# Altium PCB DRV8833_Dev.PcbDoc
Units mm, origin at the board's own origin, x right, y up, seen from the top; angles counter-clockwise.
Board outline 28.45 x 22.1 mm, 2 copper layers (Top Layer, Bottom Layer); 10 components, 18 nets, 47 pads, 0 vias.
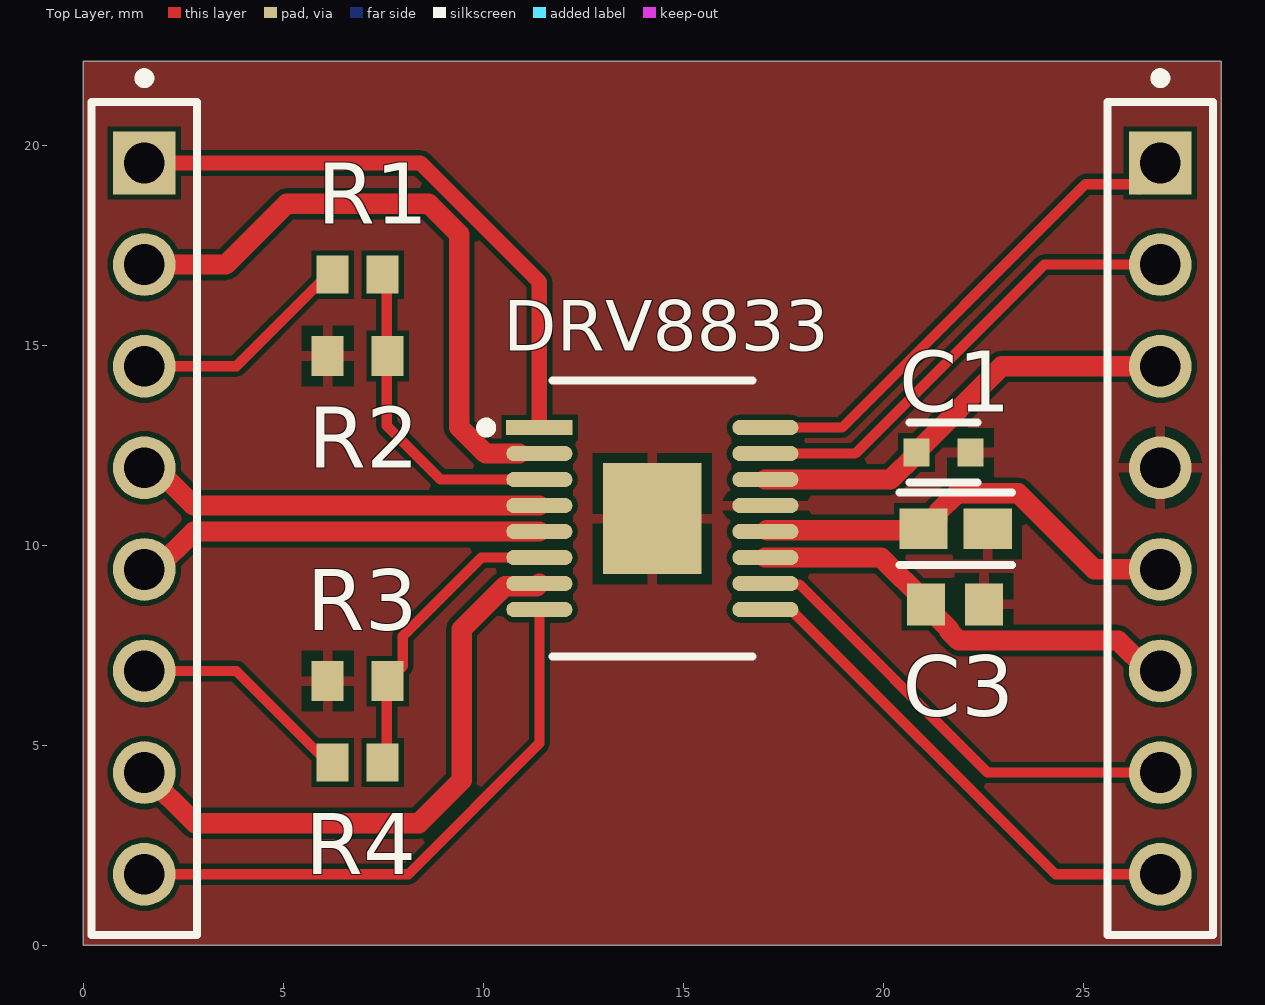
[diagram p0: Top Layer view]
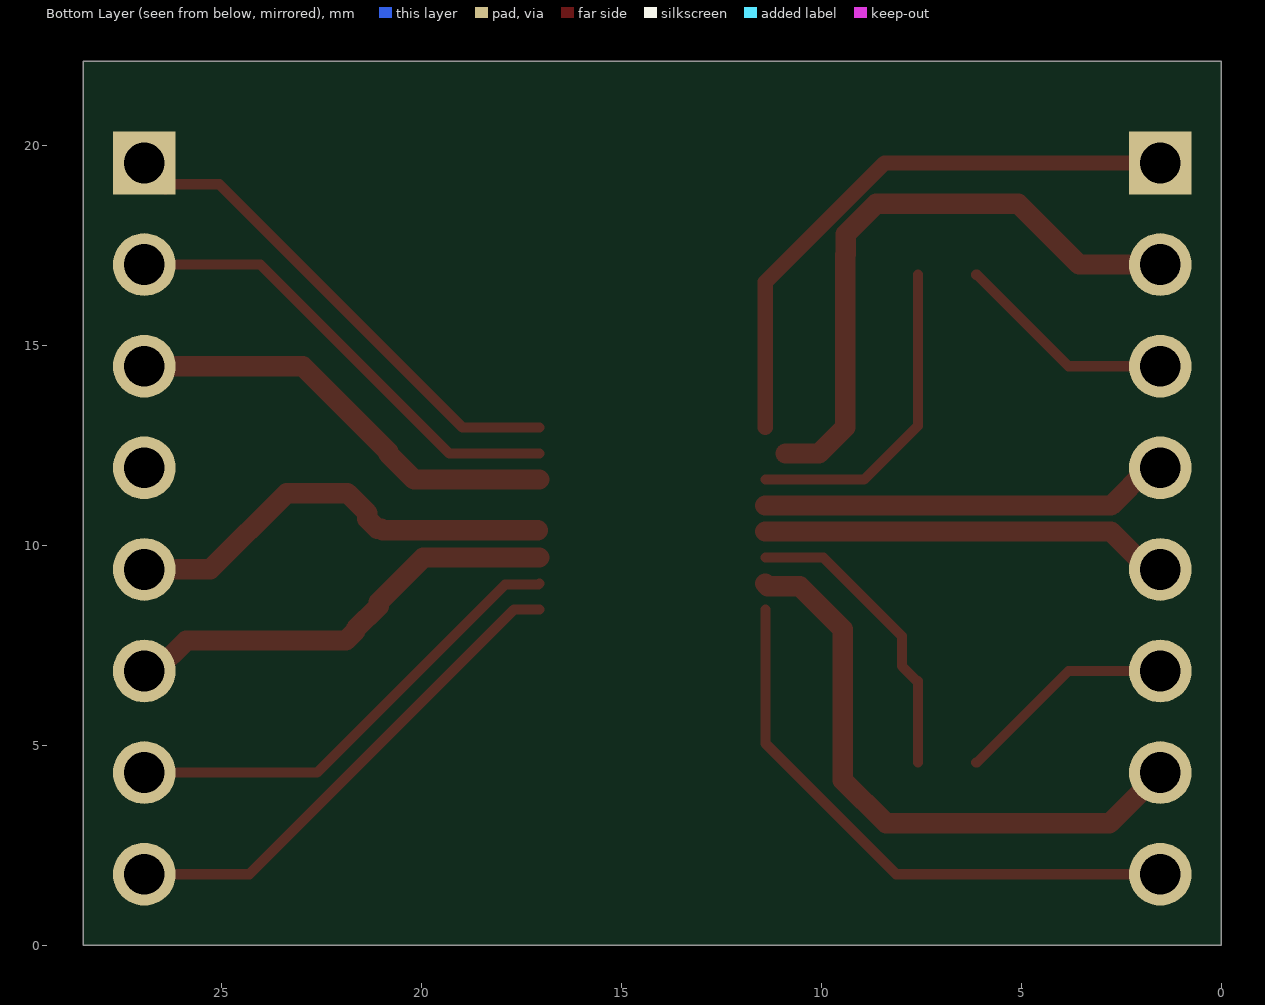
[diagram p1: Bottom Layer view, seen from below]
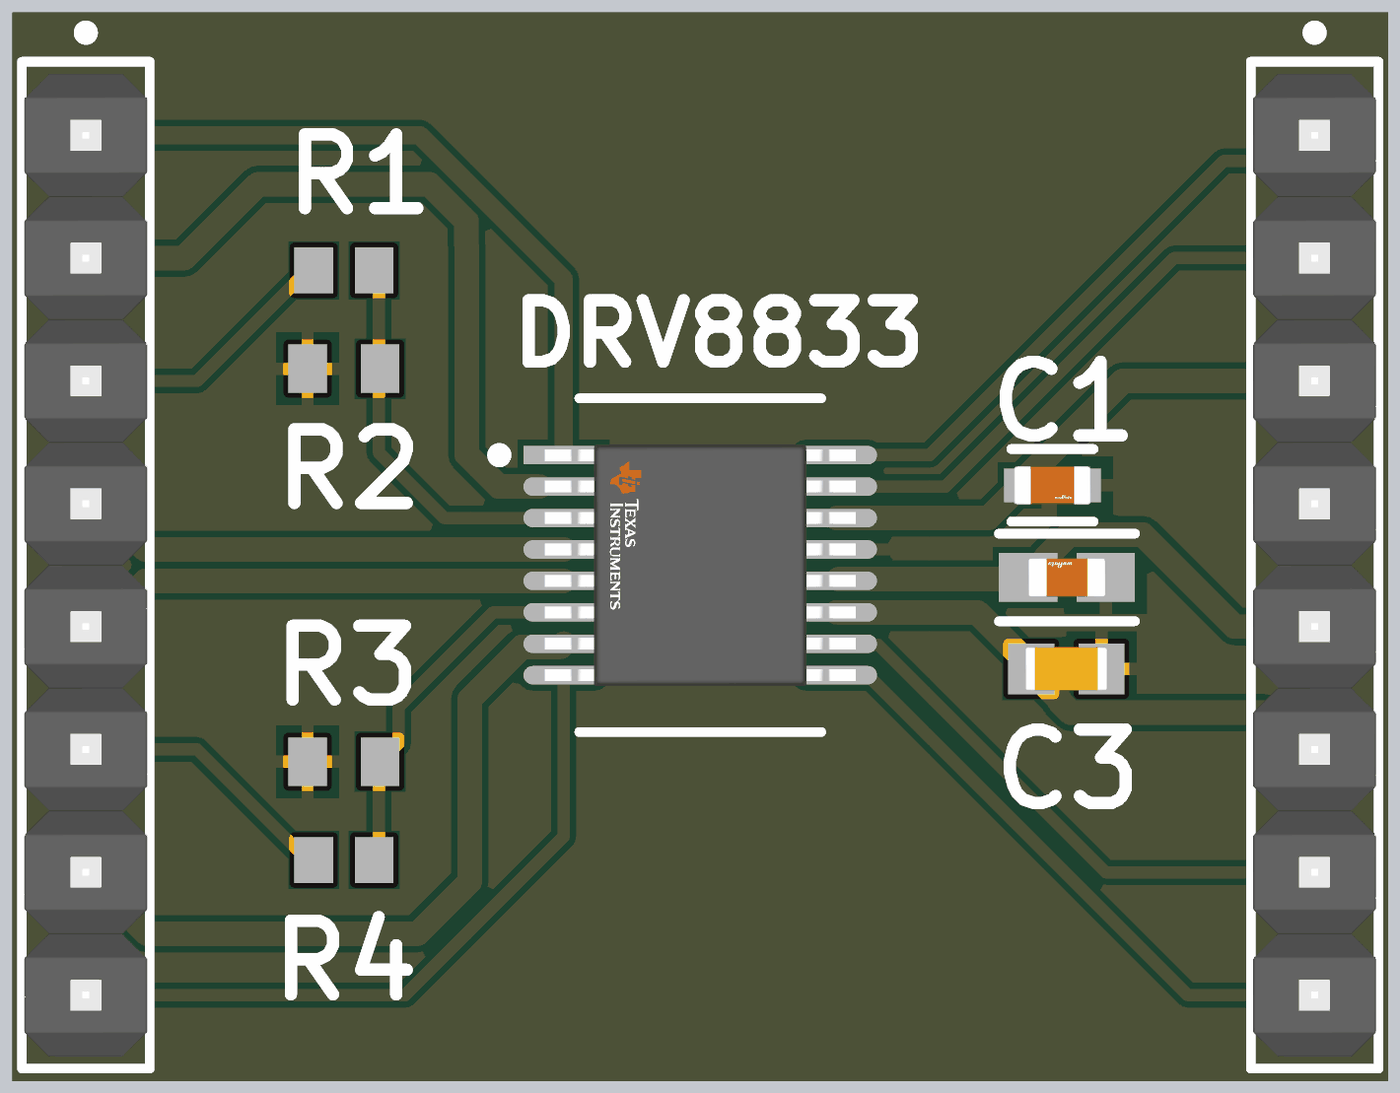
[diagram p2: 3D render of the assembled board from above, using the file's embedded part models]

## Layer stack, top to bottom
Top Solder: solder mask 0.0102, Solder Resist, Dk 3.5
Top Layer: signal copper 0.0356
Dielectric 1: dielectric 0.32, FR-4, Dk 4.8
Bottom Layer: signal copper 0.0356
Bottom Solder: solder mask 0.0102, Solder Resist, Dk 3.5

## Board outline
0,0 0,22.098 28.448,22.098 28.448,0

## Design rules (kind name [scope] priority, off if disabled: settings)
Clearance [All] p1: gap=0.127 ignorepadtopadclearanceinfootprint=FALSE
PolygonConnect [All] p1: connectstyle=Relief reliefconductorwidth=0.254 reliefentries=4 polygonreliefangle="90 Angle" airgapwidth=0.254
RoutingVias [All] p1: holewidth=0.711 width=1.27 viastyle="Through Hole" minholewidth=0.711 minwidth=1.27 maxholewidth=0.711 maxwidth=1.27
SilkToSolderMaskClearance [IsPad] p1 off: minsilkscreentomaskgap=0.254 clearancetoexposedcopper=TRUE
SolderMaskExpansion [All] p1: expansion=0.102 istentingtop=FALSE
Width [All] p1: maxlimit=0.508 minlimit=0.254 preferedwidth=0.254 minimp=50.000000 maximp=50.000000 favimp=50.000000
29 further rules are at their usual default settings.

## Classes and differential pairs
component class DRV8833_Dev: C1 C3 DRV8833 R1 R2 R3 R4

## Components (designator, comment, footprint, x,y, rotation, side; value= is the part's Value field where it differs from the comment)
C1 "2.2 uF" FP-GRM188-0_1-e0_2_0_5-MFG 21.503,12.319 r0 top
C2 "10uF" FP-GRM188-0_1-e0_2_0_55-IPC_A 21.804,10.414 r180 top
C3 "0.01 uF" CAPC1608X90X35ML10T15 21.791,8.526 r180 top
Conn1 "M20-9990846" FP-M20-9990846-MFG 1.524,10.668 r270 top
Conn2 "M20-9990846" FP-M20-9990846-MFG 26.924,10.668 r270 top
DRV8833 "DRV8833PWPR" FP-PWP0016C-IPC_B 14.224,10.668 r0 top (schematic designator U?)
R1 "" RESC1609X50X30NL10T20 6.858,16.764 r180 top
R2 "" RESC1608X55X25ML10T15 6.858,14.732 r180 top
R3 "" RESC1608X55X25ML10T15 6.858,6.604 r180 top
R4 "" RESC1609X50X30NL10T20 6.858,4.572 r180 top

## Footprints (in the part's own frame and the unit in brackets; to place one, negate y for a bottom-side part, rotate by r counter-clockwise, add the part's x,y. Pads: shape width x height; smd on the part's side, far side on the other; paste and mask are expansions set on the pad)
CAPC1608X90X35ML10T15 [mm] "Chip Capacitor, 2-Leads, Body 1.7x0.9mm, IPC Low Density"
  rect 0.95x1.05 smd: 1(-0.725,0) 2(0.725,0)
  body extent -0.85,-0.45 0.85,0.45, height 0.9
FP-GRM188-0_1-e0_2_0_5-MFG [mm]
  rect 0.65x0.7 smd paste+0 mask+0: 1(-0.675,0) 2(0.675,0)
  silkscreen extent -0.85,-0.75 0.85,0.75, body extent -1.1,-0.55 1.1,0.55, height 0.25
FP-GRM188-0_1-e0_2_0_55-IPC_A [mm]
  rect 1.208x1.012 smd paste+0 mask+0: 1(-0.802,0) 2(0.802,0)
  silkscreen extent -1.41,-0.91 1.41,0.91, body extent -1.91,-1.01 1.91,1.01, height 0.25
FP-M20-9990846-MFG [mm]
  rect 1.57x1.57 hole 1.02 paste-1000 mask+0: 1(-8.89,0)
  round 1.57 hole 1.02 paste-1000 mask+0: 2(-6.35,0) 3(-3.81,0) 4(-1.27,0) 5(1.27,0) 6(3.81,0) 7(6.35,0) 8(8.89,0)
  silkscreen extent -11.13,-1.32 10.41,1.32, body extent -10.51,-1.42 10.51,1.42, height 0.25
FP-PWP0016C-IPC_B [mm]
  rect 1.655x0.381 smd paste+0 mask+0: 1(-2.825,2.275)
  rrect100% 1.655x0.381 smd paste+0 mask+0: 2(-2.825,1.625) 3(-2.825,0.975) 4(-2.825,0.325) 5(-2.825,-0.325) 6(-2.825,-0.975) 7(-2.825,-1.625) 8(-2.825,-2.275) 9(2.825,-2.275) 10(2.825,-1.625) 11(2.825,-0.975) 12(2.825,-0.325) 13(2.825,0.325) 14(2.825,0.975) 15(2.825,1.625) 16(2.825,2.275)
  rect 2.46x2.77 smd paste-1000 mask+0: 17(0,0)
  silkscreen extent -4.28,-3.45 2.5,3.45, body extent -3.9,-2.75 3.9,2.75, height 0.25
RESC1608X55X25ML10T15 [mm] "Chip Resistor, 2-Leads, Body 1.60x0.80mm, IPC Low Density"
  rect 0.8x1 smd: 1(-0.75,0) 2(0.75,0)
  body extent -0.85,-0.45 0.85,0.45, height 0.55
RESC1609X50X30NL10T20 [mm] "Chip Resistor, 2-Leads, Body 1.55x0.85mm, IPC Medium Density"
  rect 0.8x0.95 smd: 1(-0.625,0) 2(0.625,0)
  body extent -0.82,-0.48 0.82,0.48, height 0.5

## Part data
C1: library part CMP-2006-02836-2, "Chip Multilayer Ceramic Capacitors for General Purpose, 0603, 2.2uF, X7R, 15%, 10%, 10V", Capacitance=2.2uF, Case Code (Imperial)=0603, Case Code (Metric)=1608, Dielectric=X7R, Max Operating Temperature=125°C, Min Operating Temperature=-55°C, Package Quantity=1, Tolerance=10%, Voltage=10V, Case/Package=0603, Depth=0.8mm, Height=0.8mm, Lead Free="Lead Free", Length=1.6mm, Material=Ceramic, Mount="Surface Mount", Number of Pins=2, Packaging="Cut Tape", REACH SVHC="No SVHC", Termination=SMD/SMT, Thickness=0.035inch, Voltage Rating=10V, Voltage Rating (DC)=10V, Weight=7.1E-05oz, Width=0.031inch
C2: library part CMP-2006-02792-2, "Chip Multilayer Ceramic Capacitors for General Purpose, 0603, 10uF, X5R, 15%, 20%, 6.3V", Case Code (Imperial)=0603, Case Code (Metric)=1608, Dielectric=X5R, Max Operating Temperature=85°C, Min Operating Temperature=-55°C, Package Quantity=4000, Tolerance=20%, Voltage=6.3V, Capacitance=10uF, Case/Package=0603, Depth=0.8mm, Height=0.8mm, Lead Free="Lead Free", Length=1.6mm, Material=Ceramic, Mount="Surface Mount", Packaging="Tape and Reel", Radiation Hardening=No, REACH SVHC="No SVHC", Termination=SMD/SMT, Thickness=0.035inch, Voltage Rating=6.3V, Voltage Rating (DC)=6.3V, Width=0.031inch
C3: library part CMP-2100-03642-1, "Chip Capacitor, 10 nF, +/- 10%, 50 V, -55 to 125 degC, 0603 (1608 Metric), RoHS, Tape and Reel", Capacitance=10nF, Case Code (Imperial)=0603, Case Code (Metric)=1608, Dielectric=X7R, Dielectric Material=Ceramic, Insulation Resistance=10GR, Manufacturer=Murata, Max Operating Temperature=125degC, Min Operating Temperature=-55degC, Package Description="2-Pin Surface Mount Device, Body 1.6 x 0.8 mm", Package Quantity=1, Tolerance=10%, Voltage=50V, Case/Package=0603, Datasheet URL=http://search.murata.co.jp/Ceramy/image/img/A01X/G101/ENG/GRM188R71H103KA01-01.pdf, Datasheet Version=42401.0, Depth=0.8mm, Height=0.8mm, Lead Free=LeadFree, Length=1.6mm, Manufacturer URL=http://www.murata.com/, Material=Ceramic, Mount=SurfaceMount, Number of Pins=2, Package Reference=0603, Packaging=TapeandReel, REACH SVHC=Unknown, RoHSCompliant=True, Termination=SMD/SMT, Thickness=0.035inch, Voltage Rating=50V, Voltage Rating (DC)=50V, Width=0.031inch
Conn1 Conn2: library part CMP-15831-000033-1, "CONN HEADER VERT 8POS 2.54MM", Case/Package=SIL, Color=Black, Contact Resistance=30mR, Current Rating=3A, Insulation Resistance=1GR, Max Operating Temperature=105°C, Min Operating Temperature=-40°C, Package Quantity=1000, Connector Type="Male Pin", Contact Material=Brass, Contact Mating Length=0.24inch, Contact Plating=Tin, Contact Type="Male Pin", Depth=2.54mm, Gender=Male, Housing Color=Black, Housing Material=Nylon, Length=20.32mm, Max Current Rating=3A, Mount="Through Hole", Number of Contacts=8, Number of Positions=8, Number of Rows=1, Orientation=Straight, Packaging=Bulk, Pitch=2.54mm, Radiation Hardening=No, REACH SVHC="No SVHC", RoHS Compliant=Yes, Series=M20, Termination=Solder
DRV8833: library part CMP-1529-00004-3, "IC MOTOR DRIVER PAR 16HTSSOP", Case/Package=HTSSOP, Max Operating Temperature=85°C, Max Output Current=2A, Max Supply Voltage=10.8V, Min Operating Temperature=-40°C, Min Supply Voltage=2.7V, Nominal Supply Current=3mA, Output Current=1.5A, Package Quantity=2000, Fault Protection="Over Temperature", Interface=PWM, Lead Free="Lead Free", Number of Outputs=2, Number of Pins=16, Output Current per Channel=1.5A, Packaging="Tape and Reel", Radiation Hardening=No, REACH SVHC="No SVHC", RMS Current (Irms)=1.5A, RoHS Compliant=Yes, Series=DRV8833, Supply Current=3mA, Technology=NMOS
R1 R4: library part CMP-1012-00171-2, Manufacturer="Vishay Dale", Part Number=CRCW06031R00FKEA
R2 R3: library part CMP-2100-03667-1, "Chip Resistor, 0 Ohm, +/- 5%, 0.1 W, -55 to 155 degC, 0603 (1608 Metric), RoHS, Tape and Reel", Case Code (Imperial)=0603, Case Code (Metric)=1608, Manufacturer=Yageo, Max Operating Temperature=155degC, Min Operating Temperature=-55degC, Package Description="2-Pin Surface Mount Device, Body 1.6 x 0.8 mm", Package Quantity=5000, Power Rating=100mW, Resistance=0mOhm, Temperature Coefficient=200ppm/degreesC, Tolerance=5%, Voltage Rating=50V, Case/Package=0603, Composition=ThickFilm, Contact Plating=Tin, Datasheet URL=http://www.yageo.com/NewPortal/yageodocoutput?fileName=/pdf/R-Chip/PYu-RC_Group_51_RoHS_L_5.pdf, Datasheet Version="Rev. 5, 10/2016", Depth=0.8mm, Height=0.45mm, Lead Free=LeadFree, Length=1.6mm, Manufacturer URL=http://www.yageo.com/, Military Standard=Not, Number of Pins=2, Package Reference=0603, Packaging=TapeandReel, Radiation Hardening=No, REACH SVHC=NoSVHC, RoHSCompliant=true, Termination=SMD/SMT, Voltage Rating (DC)=50V, Width=0.8mm

## Nets (pads, with @x,y where several pads share a name; then routed paths per layer and width w, separated by ;. In a path a pad name is that pad's centre, name@x,y a point inside that pad or via, vN(x,y) a via of type N, cw(c..) or ccw(c..) an arc to the next point about the centre after c; other vN are vias at no path point)
AIN1: Conn2.1 DRV8833.16 | length 12.6
  Top Layer w0.254: DRV8833.16 18.966,12.943 25.05,19.027 Conn2.1@26.393,19.027
  Top Layer w0.508: Conn2.1@26.393,19.027 Conn2.1
AIN2: Conn2.2 DRV8833.15 | length 11.8
  Top Layer w0.254: DRV8833.15 19.294,12.293 24.019,17.018 Conn2.2
AISENS: Conn1.3 R1.2 | length 5.6
  Top Layer w0.254: Conn1.3 3.822,14.478 6.108,16.764 R1.2@6.132,16.764
AOUT1: Conn1.2 DRV8833.2 | length 15.5
  Top Layer w0.254: 9.393,17.277 9.398,17.272 ; DRV8833.2@10.897,12.293 DRV8833.2@10.921,12.317
  Top Layer w0.508: Conn1.2 3.556,17.018 5.08,18.542 8.631,18.542 9.393,17.78 9.393,17.277 ; 9.398,17.272 9.398,13.387 9.398,12.954 10.059,12.293 DRV8833.2@10.897,12.293
AOUT2: Conn1.4 DRV8833.4 | length 10.3
  Top Layer w0.508: Conn1.4 1.811,11.938 2.756,10.993 DRV8833.4
ASenToRes: DRV8833.3 R1.1 R2.1 | length 8.1
  Top Layer w0.254: R1.1@7.584,16.764 7.584,14.732 7.584,12.99 8.931,11.643 DRV8833.3
BIN1: Conn2.8 DRV8833.9 | length 12.6
  Top Layer w0.254: DRV8833.9 17.687,8.393 24.302,1.778 Conn2.8
BIN2: Conn2.7 DRV8833.10 | length 11.8
  Top Layer w0.254: DRV8833.10 17.074,9.019 17.905,9.019 22.606,4.318 Conn2.7
BISENS: Conn1.6 R4.2 | length 5.6
  Top Layer w0.254: Conn1.6 3.822,6.858 6.108,4.572 R4.2@6.132,4.572
BOUT1: Conn1.7 DRV8833.7 | length 15.1
  Top Layer w0.508: Conn1.7 2.794,3.048 8.382,3.048 9.461,4.127 9.461,7.901 10.54,8.979 11.335,8.979 DRV8833.7
BOUT2: Conn1.5 DRV8833.5 | length 10.3
  Top Layer w0.508: Conn1.5 1.811,9.398 2.756,10.343 DRV8833.5
BSenToRes: DRV8833.6 R3.1 R4.1 | length 7.6
  Top Layer w0.254: R4.1@7.584,4.572 7.584,6.604 R3.1 7.984,6.98 7.984,7.73 9.947,9.693 DRV8833.6
FAULT: Conn1.8 DRV8833.8 | length 14.6
  Top Layer w0.254: Conn1.8 8.128,1.778 11.399,5.049 DRV8833.8
GND: C1.2 C2.1 C3.1 Conn2.4 DRV8833.13 DRV8833.17 R2.2 R3.2
SLEEP: Conn1.1 DRV8833.1 | length 14.7
  Top Layer w0.381: Conn1.1 8.423,19.558 11.399,16.582 DRV8833.1
VCP: C3.2 Conn2.6 DRV8833.11 | length 11.1
  Top Layer w0.508: DRV8833.11 19.949,9.693 21.066,8.576 C3.2 21.066,8.476 21.647,7.896 21.647,7.857 21.884,7.62 25.875,7.62 26.637,6.858 Conn2.6
VINT: C1.1 Conn2.3 DRV8833.14 | length 11.1
  Top Layer w0.508: DRV8833.14 20.177,11.643 20.828,12.294 C1.1 20.828,12.344 22.962,14.478 Conn2.3
VM: C2.2 Conn2.5 DRV8833.12 | length 11.1
  Top Layer w0.508: DRV8833.12@17.085,10.379 20.967,10.379 C2.2 21.1,10.414 21.352,10.666 21.352,10.81 21.844,11.301 23.368,11.301 25.271,9.398 Conn2.5

## Polygon pours and split planes (outlines as drawn)
GND on Top Layer "GND_L01_P000" (solid, pour order 0): 0,22.098 28.448,22.098 28.448,0 0,0

## Silkscreen, mask and mechanical layers (free items; w line width, h text height)
Mechanical 1:
  the board outline again, w0.254